# Altium PCB pcb.PcbDoc
Units mil, origin at the board's own origin, x right, y up, seen from the top; angles counter-clockwise.
Board outline 3485 x 1572 mil, 2 copper layers (Top Layer, Bottom Layer); 50 components, 17 nets, 117 pads, 122 vias.
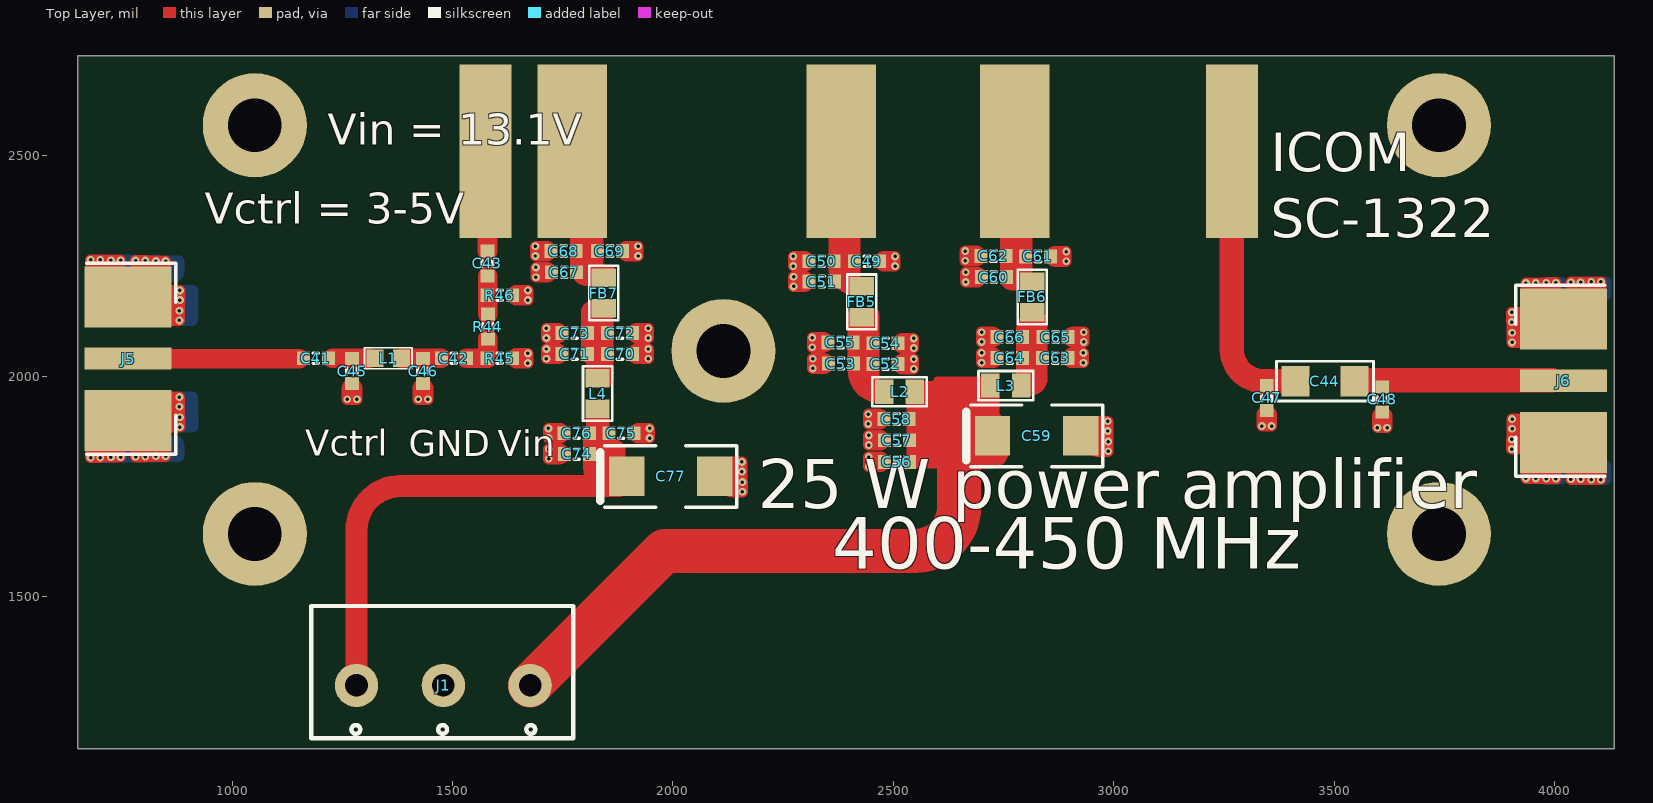
[diagram p0: Top Layer view]
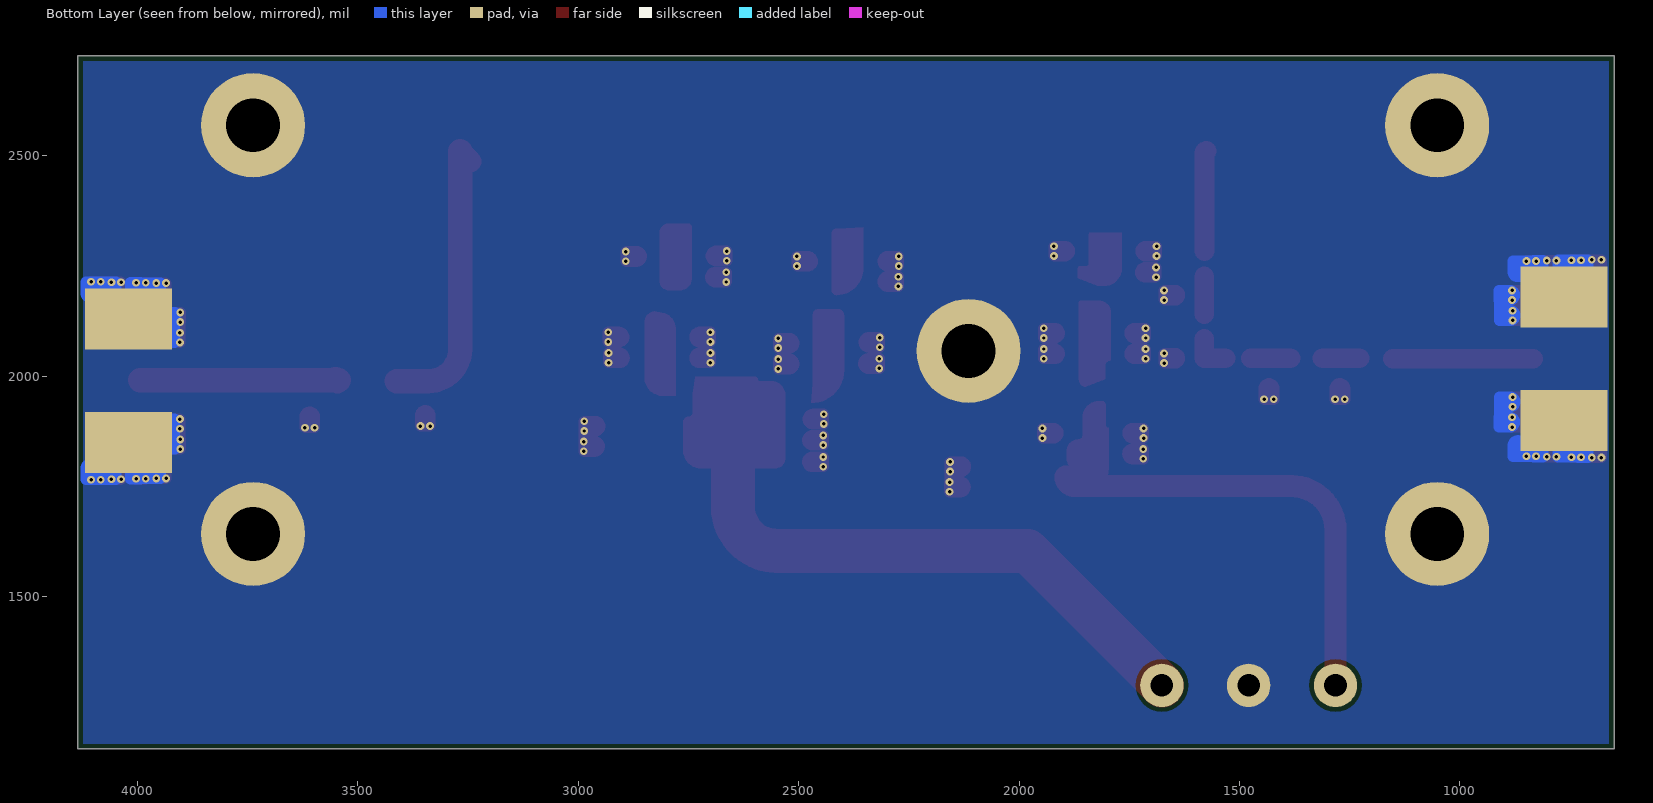
[diagram p1: Bottom Layer view, seen from below]
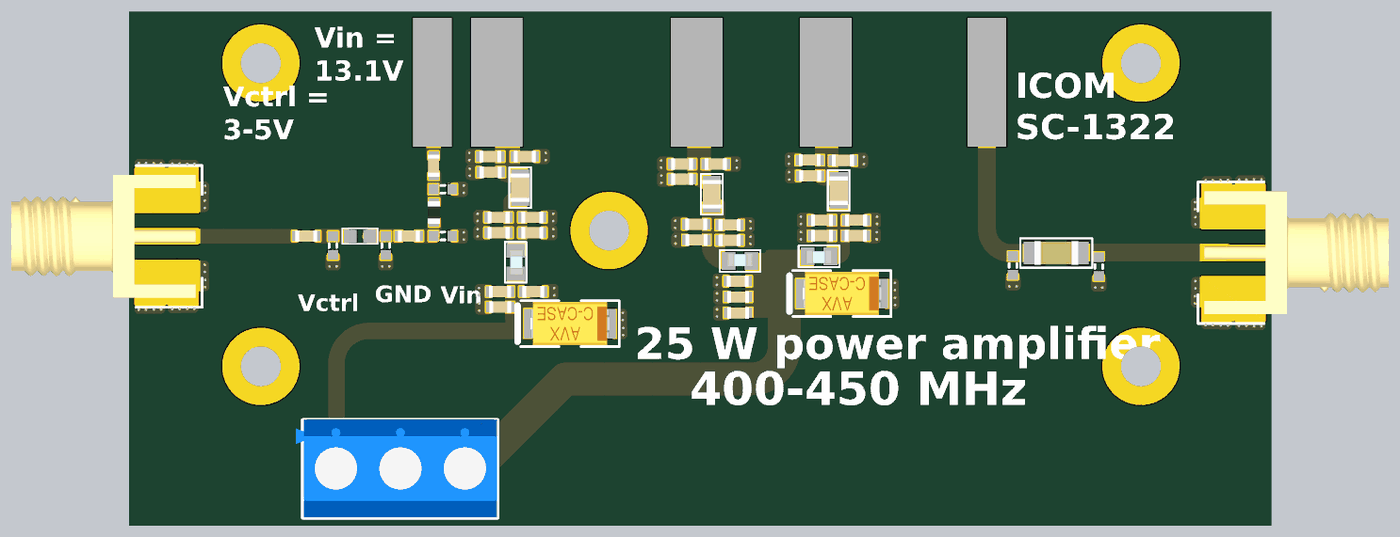
[diagram p2: 3D render of the assembled board from above, using the file's embedded part models]

## Layer stack, top to bottom
Top Solder: solder mask 0.4, Solder Resist, Dk 3.5
Top Layer: signal copper 1.4
Dielectric 1: dielectric 12.6, FR-4, Dk 4.8
Bottom Layer: signal copper 1.4
Bottom Solder: solder mask 0.4, Solder Resist, Dk 3.5

## Board outline
650,1155 4135,1155 4135,2727 650,2727

## Design rules (kind name [scope] priority, off if disabled: settings)
BoardOutlineClearance [OnBottomLayer  Or OnTopLayer] p1: gap=11.81 ignorepadtopadclearanceinfootprint=FALSE
Clearance [All] p1: gap=5 ignorepadtopadclearanceinfootprint=TRUE except(10: Arc-Poly Track-Poly SMDPad-Poly THPad-Poly Via-Poly Fill-Poly Poly-Poly Poly-Region Poly-Text Poly-Hole)
HoleSize [All] p1: absolutevalues=TRUE maxlimit=200 minlimit=7.87 maxpercent=80.000 minpercent=20.000
MinimumSolderMaskSliver [All] p1: minsoldermaskwidth=0
PlaneConnect [All] p1: planeconnectstyle=Direct reliefexpansion=20 reliefentries=4 reliefconductorwidth=10 reliefairgap=10
PolygonConnect [All] p1: connectstyle=Direct reliefconductorwidth=10 reliefentries=4 polygonreliefangle="90 Angle" airgapwidth=10
RoutingVias [All] p1: holewidth=7.87 width=17.72 viastyle="Through Hole" minholewidth=7.87 minwidth=17.72 maxholewidth=7.87 maxwidth=17.72
SilkToSilkClearance [All] p1: silktosilkclearance=0
SilkToSolderMaskClearance [IsPad] p1: minsilkscreentomaskgap=0 clearancetoexposedcopper=TRUE
SolderMaskExpansion [All] p1: expansion=4
Width [All] p1: maxlimit=1000 minlimit=5 preferedwidth=10 minimp=50.000000 maximp=50.000000 favimp=50.000000
25 further rules are at their usual default settings.

## Components (designator, comment, footprint, x,y, rotation, side; value= is the part's Value field where it differs from the comment)
C41 "Ceramic C0G" C_0603_1608 1190,2041 r0 top value=1nF
C42 "Ceramic C0G" C_0603_1608 1503,2041 r0 top value=1nF
C43 "Ceramic C0G" C_0603_1608 1579,2256 r90 top value=1nF
C44 "Ceramic C0G" C_1206_3216 3479,1989 r0 top value=1nF
C45 "-" C_NC_0603_1608 1272,2012 r270 top value=NC
C46 "-" C_NC_0603_1608 1433,2012 r270 top value=NC
C47 "-" C_NC_0603_1608 3347,1951 r270 top value=NC
C48 "-" C_NC_0603_1608 3609,1947.54 r270 top value=NC
C49 "Ceramic C0G" C_0603_1608 2440,2261 r0 top value=2.2pF
C50 "Ceramic C0G" C_0603_1608 2337,2261 r180 top value=330pF
C51 "Ceramic C0G" C_0603_1608 2337.46,2215 r180 top value=1nF
C52 "Ceramic C0G" C_0603_1608 2482,2028 r0 top value=2.2pF
C53 "Ceramic C0G" C_0603_1608 2381,2029 r180 top value=1nF
C54 "Ceramic X7R" C_0603_1608 2482,2075 r0 top value=100nF
C55 "Ceramic X7R" C_0603_1608 2380,2077 r180 top value=1uF
C56 "Ceramic C0G" C_0603_1608 2508,1806 r180 top value=1nF
C57 "Ceramic X7R" C_0603_1608 2508,1855 r180 top value=100nF
C58 "Ceramic X7R" C_0603_1608 2507,1903 r180 top value=1uF
C59 "Tantalum Capacitor" CT_2312_6032 2824.92,1865 r180 top value=22uF
C60 "Ceramic C0G" C_0603_1608 2728,2225 r180 top value=2.2pF
C61 "Ceramic C0G" C_0603_1608 2828,2272 r0 top value=330pF
C62 "Ceramic C0G" C_0603_1608 2727,2273 r180 top value=1nF
C63 "Ceramic C0G" C_0603_1608 2867,2042 r0 top value=2.2pF
C64 "Ceramic C0G" C_0603_1608 2764,2042 r180 top value=1nF
C65 "Ceramic X7R" C_0603_1608 2868,2089 r0 top value=100nF
C66 "Ceramic X7R" C_0603_1608 2764,2089 r180 top value=1uF
C67 "Ceramic C0G" C_0603_1608 1753,2236 r180 top value=2.2pF
C68 "Ceramic C0G" C_0603_1608 1752,2284 r180 top value=330pF
C69 "Ceramic C0G" C_0603_1608 1857,2284 r0 top value=1nF
C70 "Ceramic C0G" C_0603_1608 1880,2051 r0 top value=2.2pF
C71 "Ceramic C0G" C_0603_1608 1777,2051 r180 top value=1nF
C72 "Ceramic X7R" C_0603_1608 1880,2098 r0 top value=100nF
C73 "Ceramic X7R" C_0603_1608 1777,2098 r180 top value=1uF
C74 "Ceramic C0G" C_0603_1608 1782,1824 r180 top value=1nF
C75 "Ceramic X7R" C_0603_1608 1883,1871 r0 top value=100nF
C76 "Ceramic X7R" C_0603_1608 1781.54,1871 r180 top value=1uF
C77 "Tantalum Capacitor" CT_2312_6032 1995,1773 r180 top value=22uF
FB5 "Ferrite bead" FB_0805_2012 2428,2169 r270 top value=BLM21PG300SN1D
FB6 "Ferrite bead" FB_0805_2012 2815,2180 r270 top value=BLM21PG300SN1D
FB7 "Ferrite bead" FB_0805_2012 1843,2189 r270 top value=BLM21PG300SN1D
J1 "ARK3" J_ARK3 1479,1299 r180 top value=DG301-5.0-03P-12-18A(H)
J5 "SMA EDGE" J_SMA_EDGE 665.57,2040 r0 top value="=\"Manufacturer Part Number\""
J6 "SMA EDGE" J_SMA_EDGE 4118.43,1990 r180 top value="=\"Manufacturer Part Number\""
L1 "" L_NC_0603_1608 1354,2041 r0 top value=NC
L2 "Inductor" L_0805_2012 2514,1965 r0 top value=560nH
L3 "Inductor" L_0805_2012 2755,1979 r180 top value=560nH
L4 "Inductor" L_0805_2012 1829,1961 r270 top value=560nH
R44 "Resistor" R_0603_1608 1580,2113 r90 top value=0R
R45 "Resistor" R_NC_0603_1608 1607,2041 r0 top value=NC
R46 "Resistor" R_NC_0603_1608 1607,2184 r0 top value=NC

## Footprints (in the part's own frame and the unit in brackets; to place one, negate y for a bottom-side part, rotate by r counter-clockwise, add the part's x,y. Pads: shape width x height; smd on the part's side, far side on the other; paste and mask are expansions set on the pad)
C_0603_1608 [mm]
  rect 0.75x0.8 smd: 1(-0.725,0) 2(0.725,0)
  silkscreen extent -0.15,-0.3 0.15,0.3, body extent -0.85,-0.45 0.85,0.45, height 0.89
C_1206_3216 [mil]
  rect 64x70 smd: 1(-67,0) 2(67,0)
  silkscreen extent -110,-45 110,45, body extent -67,-35 67,35, height 39
C_NC_0603_1608 [mm]
  rect 0.75x0.8 smd: 1(-0.725,0) 2(0.725,0)
  silkscreen extent -0.15,-0.3 0.15,0.3, body extent -0.85,-0.45 0.85,0.45, height 0.89
CT_2312_6032 [mm]
  rect 2.03x2.28 smd: 1(2.54,0) 2(-2.54,0)
  silkscreen extent -3.81,-1.78 4.06,1.78, body extent -3.05,-1.67 3.05,1.68, height 2.7
FB_0805_2012 [mil]
  rect 42x55 smd: 1(-35,0) 2(35,0)
  silkscreen extent -62,-33 62,33, body extent -43,-29 44,29, height 53
J_ARK3 [mm]
  round 2.5 hole 1.3: 1(-5,0) 2(0,0) 3(5,0)
  silkscreen extent -7.49,-4.57 7.62,3.05, body extent -7.46,-4.6 8.14,3, height 10.05
J_SMA_EDGE [mm]
  rect 5x1.27 smd paste-5: 1(2.5,0)
  rect 5x3.5 smd paste-5: 2(2.5,-3.556) 2(2.5,3.556)
  rect 5x3.5 smd far side paste-5: 2(2.5,-3.556) 2(2.5,3.556)
  silkscreen extent 0.13,-5.5 5.25,5.5, body extent -9.53,-4.77 4.75,4.76, height 4.5
L_0805_2012 [mil]
  rect 42x55 smd: 1(-35,0) 2(35,0)
  silkscreen extent -62,-33 62,33, body extent -39,-18 39,23, height 50
L_NC_0603_1608 [mil]
  rect 39x40 smd: 1(-30,0) 2(30,0)
  silkscreen extent -54,-24 54,24, body extent -31,-20 32,20, height 31
R_0603_1608 [mm]
  rect 0.75x0.8 smd: 1(-0.725,0) 2(0.725,0)
  silkscreen extent -0.15,-0.3 0.15,0.3, body extent -0.87,-0.47 0.88,0.48, height 0.54
R_NC_0603_1608 [mm]
  rect 0.75x0.8 smd: 1(-0.725,0) 2(0.725,0)
  silkscreen extent -0.15,-0.3 0.15,0.3, body extent -0.87,-0.47 0.88,0.48, height 0.54

## Part data
C41 C42 C43 C51 C53 C56 C62 C64 C69 C71 C74: library part C_1nF_50V_C0G_0603_5, "Capacitor", dielectric=C0G, Manufacturer=Samsung, Manufacturer Part Number=CL10C102JB8NNNC, Tolerance (%)=5, voltage=50V, HelpURL=http://www.tme.eu/pl/Document/7da762c1dbaf553c64ad9c40d3603826/mlcc_samsung.pdf, Part Number=C_1nF_50V_C0G_0603_5, SCH_Footprint=0603, Supplier 1=TME, Supplier 2="RS Components", Supplier 3=Farnell, Supplier 4=Mouser, Supplier 5=Digi-Key, Supplier Part Number 1=CL10C102JB8NNNC
C44: library part C_1nF_2kV_C0G_1206_10, "Capacitor", dielectric=C0G, Manufacturer=AVX, Manufacturer Part Number=1206GC102KAT1A, Tolerance (%)=10, voltage=2kV, HelpURL=http://www.tme.eu/pl/Document/667fe6e7748c0ed1675574c6bf64b751/AVX_X7R.pdf, Part Number=C_1nF_2kV_C0G_1206_10, SCH_Footprint=1206, Supplier 1=TME, Supplier 2="RS Components", Supplier 3=Farnell, Supplier 4=Mouser, Supplier 5=Digi-Key, Supplier Part Number 1=1206GC102KAT1A
C45 C46 C47 C48: library part C_GENERIC_0603, "Capacitor", Tolerance (%)=0, voltage=0V, dielectric=-, HelpURL=http://-, Manufacturer=-, Manufacturer Part Number=-, Part Number=C_GENERIC_0603, SCH_Footprint=0603, Supplier 1=TME, Supplier 2="RS Components", Supplier 3=Farnell, Supplier 4=Mouser, Supplier 5=Digi-Key
C49 C52 C60 C63 C67 C70: library part C_2.2pF_100V_C0G_0603_5, "Capacitor", dielectric=C0G, Manufacturer=AVX, Manufacturer Part Number=06031A2R2BAT2A, Tolerance (%)=5, voltage=100V, HelpURL=https://datasheet.octopart.com/06031A2R2BAT2A-AVX-datasheet-167032.pdf, Part Number=C_2.2pF_100V_C0G_0603_5, SCH_Footprint=0603, Supplier 1=TME, Supplier 2="RS Components", Supplier 3=Farnell, Supplier 4=Mouser, Supplier 5=Digi-Key, Supplier Part Number 3=2579012, Supplier Part Number 4=581-06031A2R2BAT2A, Supplier Part Number 5=478-3686-1-ND
C50 C61 C68: library part C_330pF_50V_C0G_0603_5, "Capacitor", dielectric=C0G, Manufacturer=Murata, Manufacturer Part Number=GRM1885C1H331JA01D, Tolerance (%)=5, voltage=50V, HelpURL=http://www.mouser.com/ds/2/281/c02e-2905.pdf, Part Number=C_330pF_50V_C0G_0603_5, SCH_Footprint=0603, Supplier 1=TME, Supplier 2="RS Components", Supplier 3=Farnell, Supplier 4=Mouser, Supplier 5=Digi-Key, Supplier Part Number 1=GRM1885C1H331JA01D
C54 C57 C65 C72 C75: library part C_100nF_50V_X7R_0603_5, "Capacitor", dielectric=X7R, Manufacturer=Samsung, Manufacturer Part Number=CL10B104JB8NNNC, Tolerance (%)=5, voltage=50V, HelpURL=http://www.tme.eu/pl/Document/4a42202b32dab16128fe107dd69598cc/samsung-chip-cap.pdf, Part Number=C_100nF_50V_X7R_0603_5, SCH_Footprint=0603, Supplier 1=TME, Supplier 2="RS Components", Supplier 3=Farnell, Supplier 4=Mouser, Supplier 5=Digi-Key, Supplier Part Number 1=CL10B104JB8NNNC
C55 C58 C66 C73 C76: library part C_1uF_25V_X7R_0603_10, "Capacitor", dielectric=X7R, Manufacturer=Samsung, Manufacturer Part Number=CL10B105KA8NNNC, Tolerance (%)=10, voltage=25V, HelpURL=http://www.tme.eu/pl/Document/4a42202b32dab16128fe107dd69598cc/samsung-chip-cap.pdf, Part Number=C_1uF_25V_X7R_0603_10, SCH_Footprint=0603, Supplier 1=TME, Supplier 2="RS Components", Supplier 3=Farnell, Supplier 4=Mouser, Supplier 5=Digi-Key, Supplier Part Number 1=CL10B105KA8NNNC
C59 C77: library part CT_22uF_16V_TA2O5_2312_10, "Capacitor", dielectric=TA2O5, Manufacturer=Kemet, Manufacturer Part Number=T494C226K016AT, Tolerance (%)=10, voltage=16V, HelpURL=https://content.kemet.com/datasheets/KEM_T2008_T494.pdf, Part Number=CT_22uF_16V_TA2O5_2312_10, SCH_Footprint=2312, Supplier 1=TME, Supplier 2="RS Components", Supplier 3=Farnell, Supplier 4=Mouser, Supplier 5=Digi-Key, Supplier Part Number 1=T494C226K016AT, Supplier Part Number 2=1726639, Supplier Part Number 3=2762195, Supplier Part Number 4=80-T494C226K016, Supplier Part Number 5=399-3845-1-ND
FB5 FB6 FB7: library part FB_BLM21PG300SN1D, "Ferrite Bead", Current=3A, Manufacturer=Murata, Manufacturer Part Number=BLM21PG300SN1D, Resistance=30R, HelpURL=http://www.mouser.com/ds/2/281/c31e-794748.pdf, Part Number=FB_BLM21PG300SN1D, SCH_Footprint=0805, Supplier 1=TME, Supplier 2="RS Components", Supplier 3=Farnell, Supplier 4=Mouser, Supplier 5=Digi-Key, Supplier Part Number 1=BLM21PG300SN1D, Supplier Part Number 2=7241536, Supplier Part Number 3=1515662, Supplier Part Number 4=81-BLM21P300S, Supplier Part Number 5=490-1052-1-ND
J1: library part J_TB-5.0-P-3P, "ARK Screw terminal, 3-Pin", Manufacturer="DEGSON ELECTRONICS", Manufacturer Part Number=DG301-5.0-03P-12-18A(H), Supplier Part Number 1=DG301-5.0-3/6B, Component Type=Standard, HelpURL=https://datasheet.octopart.com/DG301-5.0-03P-12-18A%28H%29-Degson-datasheet-17801202.pdf, Part Number=J_TB-5.0-P-3P, SCH_Footprint=ARK3, Supplier 1=TME, Supplier 2="RS Components", Supplier 3=Farnell, Supplier 4=Mouser, Supplier 5=Digi-Key
J5 J6: library part J_SMA_EDGE_UNIVERSAL, "SMA connector", Component Type=Standard, Part Number=J_SMA_EDGE_UNIVERSAL, SCH_Footprint="SMA EDGE", Supplier 1=TME, Supplier 2="RS Components", Supplier 3=Farnell, Supplier 4=Mouser, Supplier 5=Digi-Key
L1: library part L_0603, "Induction", Part Number=L_0603, SCH_Footprint=0603, Supplier 1=TME, Supplier 2="RS Components", Supplier 3=Farnell, Supplier 4=Mouser, Supplier 5=Digi-Key
L2 L3 L4: library part L_560nH_1.7A_0805, "Induction", Current=1.7A, Manufacturer=Wurth, Manufacturer Part Number=74479974156, Resistance=100mR, HelpURL=https://datasheet.octopart.com/74479974156-W%C3%BCrth-Elektronik-datasheet-62333476.pdf, Part Number=L_560nH_1.7A_0805, SCH_Footprint=0805, Supplier 1=TME, Supplier 2="RS Components", Supplier 3=Farnell, Supplier 4=Mouser, Supplier 5=Digi-Key, Supplier Part Number 2=923-6378, Supplier Part Number 3=2543275, Supplier Part Number 4=710-74479974156, Supplier Part Number 5=732-9693-1-ND
R44: library part R_0R_0603_5, Manufacturer=Samsung, Manufacturer Part Number=RC1608J000CS, Power=100mW, Tolerance=5%, voltage=50V, HelpURL=http://www.samsungsem.com/kr/support/product-search/chip-resistor/RC1608J000CS.jsp, Part Number=R_0R_0603_5, SCH_Footprint=0603, Supplier 1=TME, Supplier 2="RS Components", Supplier 3=Farnell, Supplier 4=Mouser, Supplier 5=Digi-Key, Supplier Part Number 5=1276-3510-1-ND
R45 R46: library part R_GENERIC_0603, Part Number=R_GENERIC_0603, SCH_Footprint=0603, Supplier 1=TME, Supplier 2="RS Components", Supplier 3=Farnell, Supplier 4=Mouser, Supplier 5=Digi-Key

## Free pads (board coordinates)
  round 236.22 hole 122.05: 6(1051.48,1642.48) 6(1051.48,2569.52) 6(2114.47,2057.71) 6(3737.52,1642.48) 6(3737.52,2569.52)
  rect 157.48x393.7 smd: Vcc1(1771.65,2511) Vcc2(2381.89,2511) Vcc3(2775.59,2511)
  rect 118.11x393.7 smd: Vin(1574.8,2511) Vout(3267.72,2511)

## Via types
v1: diameter 17.72, hole 7.87, Top Layer to Bottom Layer, tented both sides, 122 vias

## Nets (pads, with @x,y where several pads share a name; then routed paths per layer and width w, separated by ;. In a path a pad name is that pad's centre, name@x,y a point inside that pad or via, vN(x,y) a via of type N, cw(c..) or ccw(c..) an arc to the next point about the centre after c; other vN are vias at no path point)
GND: C45.2 C46.2 C47.2 C48.2 C49.2 C50.2 C51.2 C52.2 C53.2 C54.2 C55.2 C56.2 C57.2 C58.2 C59.2 C60.2 C61.2 C62.2 C63.2 C64.2 C65.2 C66.2 C67.2 C68.2 C69.2 C70.2 C71.2 C72.2 C73.2 C74.2 C75.2 C76.2 C77.2 J1.2 J5.2 J6.2 pad.6 R45.2 R46.2 | length 9603.9
  Top Layer w25: v1(701,1815.54) cw(c702,1815.54) 702,1816.54 v1(725,1816.54) ; v1(701,1815.54) 701,1840 ccw(c690,1840) 690,1851 ccw(c690,1840) 679,1840 v1(679,1815.54) v1(701,1815.54) ; v1(701,2264.46) ccw(c702,2264.46) 702,2263.46 v1(725,2263.46) ; v1(701,2264.46) 701,2240 cw(c690,2240) 690,2229 cw(c690,2240) 679,2240 v1(679,2264.46) v1(701,2264.46) ; v1(725,1816.54) 725,1841 cw(c736,1841) 736,1852 cw(c736,1841) 747,1841 v1(747,1816.54) v1(725,1816.54) ; v1(725,2263.46) 725,2239 ccw(c736,2239) 736,2228 ccw(c736,2239) 747,2239 v1(747,2263.46) v1(725,2263.46) ; v1(803,1817.54) cw(c804,1817.54) 804,1818.54 v1(827,1818.54) ; v1(803,1817.54) 803,1842 ccw(c792,1842) 792,1853 ccw(c792,1842) 781,1842 v1(781,1817.54) v1(803,1817.54) ; v1(803,2262.46) ccw(c804,2262.46) 804,2261.46 v1(827,2261.46) ; v1(803,2262.46) 803,2238 cw(c792,2238) 792,2227 cw(c792,2238) 781,2238 v1(781,2262.46) v1(803,2262.46) ; v1(827,1818.54) 827,1843 cw(c838,1843) 838,1854 cw(c838,1843) 849,1843 v1(849,1818.54) v1(827,1818.54) ; v1(827,2261.46) 827,2237 ccw(c838,2237) 838,2226 ccw(c838,2237) 849,2237 v1(849,2261.46) v1(827,2261.46) ; v1(880.46,1931) 856,1931 cw(c856,1942) 845,1942 cw(c856,1942) 856,1953 v1(880.46,1953) v1(880.46,1931) ; v1(880.46,1931) 880.46,1908 ccw(c881.46,1908) v1(881.46,1907) ; v1(880.46,2149) 856,2149 ccw(c856,2138) 845,2138 ccw(c856,2138) 856,2127 v1(880.46,2127) v1(880.46,2149) ; v1(880.46,2149) 880.46,2172 cw(c881.46,2172) v1(881.46,2173) ; v1(881.46,1907) 857,1907 ccw(c857,1896) 846,1896 ccw(c857,1896) 857,1885 v1(881.46,1885) v1(881.46,1907) ; v1(881.46,2173) 857,2173 cw(c857,2184) 846,2184 cw(c857,2184) 857,2195 v1(881.46,2195) v1(881.46,2173) ; v1(2156.46,1784) v1(2156.46,1806) 2132,1806 ccw(c2132,1795) 2121,1795 ccw(c2132,1795) 2132,1784 v1(2156.46,1784) ; v1(2156.46,1784) 2156.46,1761 ccw(c2157.46,1761) v1(2157.46,1760) ; v1(2157.46,1760) v1(2157.46,1738) 2133,1738 cw(c2133,1749) 2122,1749 cw(c2133,1749) 2133,1760 v1(2157.46,1760) ; v1(2986.38,1876) 2961.92,1876 cw(c2961.92,1887) 2950.92,1887 cw(c2961.92,1887) 2961.92,1898 v1(2986.38,1898) v1(2986.38,1876) ; v1(2986.38,1876) 2986.38,1853 ccw(c2987.38,1853) v1(2987.38,1852) ; v1(2987.38,1852) 2962.92,1852 ccw(c2962.92,1841) 2951.92,1841 ccw(c2962.92,1841) 2962.92,1830 v1(2987.38,1830) v1(2987.38,1852) ; v1(3902.54,1857) ccw(c3902.54,1858) 3903.54,1858 v1(3903.54,1881) ; v1(3902.54,1857) 3927,1857 cw(c3927,1846) 3938,1846 cw(c3927,1846) 3927,1835 v1(3902.54,1835) v1(3902.54,1857) ; v1(3902.54,2123) cw(c3902.54,2122) 3903.54,2122 v1(3903.54,2099) ; v1(3902.54,2123) v1(3902.54,2145) 3927,2145 cw(c3927,2134) 3938,2134 cw(c3927,2134) 3927,2123 v1(3902.54,2123) ; v1(3903.54,1881) v1(3903.54,1903) 3928,1903 cw(c3928,1892) 3939,1892 cw(c3928,1892) 3928,1881 v1(3903.54,1881) ; v1(3903.54,2099) 3928,2099 cw(c3928,2088) 3939,2088 cw(c3928,2088) 3928,2077 v1(3903.54,2077) v1(3903.54,2099) ; v1(3957,1768.54) 3957,1793 ccw(c3946,1793) 3946,1804 ccw(c3946,1793) 3935,1793 v1(3935,1768.54) v1(3957,1768.54) ; v1(3957,1768.54) 3980,1768.54 cw(c3980,1767.54) v1(3981,1767.54) ; v1(3957,2211.46) v1(3935,2211.46) 3935,2187 ccw(c3946,2187) 3946,2176 ccw(c3946,2187) 3957,2187 v1(3957,2211.46) ; v1(3957,2211.46) 3980,2211.46 ccw(c3980,2212.46) v1(3981,2212.46) ; v1(3981,1767.54) 3981,1792 cw(c3992,1792) 3992,1803 cw(c3992,1792) 4003,1792 v1(4003,1767.54) v1(3981,1767.54) ; v1(3981,2212.46) v1(4003,2212.46) 4003,2188 cw(c3992,2188) 3992,2177 cw(c3992,2188) 3981,2188 v1(3981,2212.46) ; v1(4059,1766.54) 4059,1791 ccw(c4048,1791) 4048,1802 ccw(c4048,1791) 4037,1791 v1(4037,1766.54) v1(4059,1766.54) ; v1(4059,1766.54) 4082,1766.54 cw(c4082,1765.54) v1(4083,1765.54) ; v1(4059,2213.46) v1(4037,2213.46) 4037,2189 ccw(c4048,2189) 4048,2178 ccw(c4048,2189) 4059,2189 v1(4059,2213.46) ; v1(4059,2213.46) 4082,2213.46 ccw(c4082,2214.46) v1(4083,2214.46) ; v1(4083,1765.54) v1(4105,1765.54) 4105,1790 ccw(c4094,1790) 4094,1801 ccw(c4094,1790) 4083,1790 v1(4083,1765.54) ; v1(4083,2214.46) v1(4105,2214.46) 4105,2190 cw(c4094,2190) 4094,2179 cw(c4094,2190) 4083,2190 v1(4083,2214.46) ; v1(1261,1948) 1261,1972.46 cw(c1272,1972.46) C45.2 cw(c1272,1972.46) 1283,1972.46 v1(1283,1948) v1(1261,1948) ; v1(1422,1948) v1(1444,1948) 1444,1972.46 ccw(c1433,1972.46) C46.2 ccw(c1433,1972.46) 1422,1972.46 v1(1422,1948) ; R45.2 cw(c1646.54,2041) 1646.54,2052 v1(1671,2052) v1(1671,2030) 1646.54,2030 cw(c1646.54,2041) R45.2 ; R46.2 cw(c1646.54,2184) 1646.54,2195 v1(1671,2195) v1(1671,2173) 1646.54,2173 cw(c1646.54,2184) R46.2 ; v1(1688,2273) v1(1688,2295) 1712.46,2295 cw(c1712.46,2284) C68.2 cw(c1712.46,2284) 1712.46,2273 v1(1688,2273) ; v1(1689,2225) v1(1689,2247) 1713.46,2247 cw(c1713.46,2236) C67.2 cw(c1713.46,2236) 1713.46,2225 v1(1689,2225) ; v1(1713,2040) v1(1713,2062) 1737.46,2062 cw(c1737.46,2051) C71.2 cw(c1737.46,2051) 1737.46,2040 v1(1713,2040) ; v1(1713,2087) v1(1713,2109) 1737.46,2109 cw(c1737.46,2098) C73.2 cw(c1737.46,2098) 1737.46,2087 v1(1713,2087) ; v1(1717.54,1860) v1(1717.54,1882) 1742,1882 cw(c1742,1871) C76.2 cw(c1742,1871) 1742,1860 v1(1717.54,1860) ; v1(1718,1813) v1(1718,1835) 1742.46,1835 cw(c1742.46,1824) C74.2 cw(c1742.46,1824) 1742.46,1813 v1(1718,1813) ; C69.2 cw(c1896.54,2284) 1896.54,2295 v1(1921,2295) v1(1921,2273) 1896.54,2273 cw(c1896.54,2284) C69.2 ; C70.2 cw(c1919.54,2051) 1919.54,2062 v1(1944,2062) v1(1944,2040) 1919.54,2040 cw(c1919.54,2051) C70.2 ; C72.2 cw(c1919.54,2098) 1919.54,2109 v1(1944,2109) v1(1944,2087) 1919.54,2087 cw(c1919.54,2098) C72.2 ; C75.2 cw(c1922.54,1871) 1922.54,1882 v1(1947,1882) v1(1947,1860) 1922.54,1860 cw(c1922.54,1871) C75.2 ; v1(2273,2250) v1(2273,2272) 2297.46,2272 cw(c2297.46,2261) C50.2 cw(c2297.46,2261) 2297.46,2250 v1(2273,2250) ; v1(2273.46,2204) v1(2273.46,2226) 2297.91,2226 cw(c2297.91,2215) C51.2 cw(c2297.91,2215) 2297.91,2204 v1(2273.46,2204) ; v1(2316,2066) v1(2316,2088) 2340.46,2088 cw(c2340.46,2077) C55.2 cw(c2340.46,2077) 2340.46,2066 v1(2316,2066) ; v1(2317,2018) v1(2317,2040) 2341.46,2040 cw(c2341.46,2029) C53.2 cw(c2341.46,2029) 2341.46,2018 v1(2317,2018) ; v1(2443,1892) v1(2443,1914) 2467.46,1914 cw(c2467.46,1903) C58.2 cw(c2467.46,1903) 2467.46,1892 v1(2443,1892) ; v1(2444,1795) v1(2444,1817) 2468.46,1817 cw(c2468.46,1806) C56.2 cw(c2468.46,1806) 2468.46,1795 v1(2444,1795) ; v1(2444,1844) v1(2444,1866) 2468.46,1866 cw(c2468.46,1855) C57.2 cw(c2468.46,1855) 2468.46,1844 v1(2444,1844) ; C49.2 cw(c2479.54,2261) 2479.54,2272 v1(2504,2272) v1(2504,2250) 2479.54,2250 cw(c2479.54,2261) C49.2 ; C52.2 cw(c2521.54,2028) 2521.54,2039 v1(2546,2039) v1(2546,2017) 2521.54,2017 cw(c2521.54,2028) C52.2 ; C54.2 cw(c2521.54,2075) 2521.54,2086 v1(2546,2086) v1(2546,2064) 2521.54,2064 cw(c2521.54,2075) C54.2 ; v1(2663,2262) v1(2663,2284) 2687.46,2284 cw(c2687.46,2273) C62.2 cw(c2687.46,2273) 2687.46,2262 v1(2663,2262) ; v1(2664,2214) v1(2664,2236) 2688.46,2236 cw(c2688.46,2225) C60.2 cw(c2688.46,2225) 2688.46,2214 v1(2664,2214) ; v1(2700,2031) v1(2700,2053) 2724.46,2053 cw(c2724.46,2042) C64.2 cw(c2724.46,2042) 2724.46,2031 v1(2700,2031) ; v1(2700,2078) v1(2700,2100) 2724.46,2100 cw(c2724.46,2089) C66.2 cw(c2724.46,2089) 2724.46,2078 v1(2700,2078) ; C61.2 cw(c2867.54,2272) 2867.54,2283 v1(2892,2283) v1(2892,2261) 2867.54,2261 cw(c2867.54,2272) C61.2 ; C63.2 cw(c2906.54,2042) 2906.54,2053 v1(2931,2053) v1(2931,2031) 2906.54,2031 cw(c2906.54,2042) C63.2 ; C65.2 cw(c2907.54,2089) 2907.54,2100 v1(2932,2100) v1(2932,2078) 2907.54,2078 cw(c2907.54,2089) C65.2 ; v1(3336,1887) 3336,1911.46 cw(c3347,1911.46) C47.2 cw(c3347,1911.46) 3358,1911.46 v1(3358,1887) v1(3336,1887) ; v1(3598,1883.54) 3598,1908 cw(c3609,1908) C48.2 cw(c3609,1908) 3620,1908 v1(3620,1883.54) v1(3598,1883.54)
  Bottom Layer w25: v1@731,1815.54 cw(c732,1815.54) 732,1816.54 v1@755,1816.54 ; v1@731,1815.54 731,1840 ccw(c720,1840) 720,1851 ccw(c720,1840) 709,1840 709,1815.54 v1@731,1815.54 ; v1@731,2264.46 ccw(c732,2264.46) 732,2263.46 v1@755,2263.46 ; v1@731,2264.46 709,2264.46 709,2240 ccw(c720,2240) 720,2229 ccw(c720,2240) 731,2240 v1@731,2264.46 ; v1@755,1816.54 755,1841 cw(c766,1841) 766,1852 cw(c766,1841) 777,1841 777,1816.54 v1@755,1816.54 ; v1@755,2263.46 755,2239 ccw(c766,2239) 766,2228 ccw(c766,2239) 777,2239 777,2263.46 v1@755,2263.46 ; v1@833,1817.54 cw(c834,1817.54) 834,1818.54 v1@857,1818.54 ; v1@833,1817.54 811,1817.54 811,1842 cw(c822,1842) 822,1853 cw(c822,1842) 833,1842 v1@833,1817.54 ; v1@833,2262.46 ccw(c834,2262.46) 834,2261.46 v1@857,2261.46 ; v1@833,2262.46 811,2262.46 811,2238 ccw(c822,2238) 822,2227 ccw(c822,2238) 833,2238 v1@833,2262.46 ; v1@857,1818.54 857,1843 cw(c868,1843) 868,1854 cw(c868,1843) 879,1843 879,1818.54 v1@857,1818.54 ; v1@857,2261.46 857,2237 ccw(c868,2237) 868,2226 ccw(c868,2237) 879,2237 879,2261.46 v1@857,2261.46 ; 910.46,1931 910.46,1953 886,1953 ccw(c886,1942) 875,1942 ccw(c886,1942) 886,1931 910.46,1931 ; 910.46,1931 910.46,1908 ccw(c911.46,1908) 911.46,1907 ; 910.46,2149 886,2149 ccw(c886,2138) 875,2138 ccw(c886,2138) 886,2127 910.46,2127 910.46,2149 ; 910.46,2149 910.46,2172 cw(c911.46,2172) 911.46,2173 ; 911.46,1907 911.46,1885 887,1885 cw(c887,1896) 876,1896 cw(c887,1896) 887,1907 911.46,1907 ; 911.46,2173 887,2173 cw(c887,2184) 876,2184 cw(c887,2184) 887,2195 911.46,2195 911.46,2173 ; 3914.54,1857 ccw(c3914.54,1858) 3915.54,1858 3915.54,1881 ; 3914.54,1857 3939,1857 cw(c3939,1846) 3950,1846 cw(c3939,1846) 3939,1835 3914.54,1835 3914.54,1857 ; 3914.54,2123 cw(c3914.54,2122) 3915.54,2122 3915.54,2099 ; 3914.54,2123 3939,2123 ccw(c3939,2134) 3950,2134 ccw(c3939,2134) 3939,2145 3914.54,2145 3914.54,2123 ; 3915.54,1881 3940,1881 ccw(c3940,1892) 3951,1892 ccw(c3940,1892) 3940,1903 3915.54,1903 3915.54,1881 ; 3915.54,2099 3940,2099 cw(c3940,2088) 3951,2088 cw(c3940,2088) 3940,2077 3915.54,2077 3915.54,2099 ; 3969,1768.54 3947,1768.54 3947,1793 cw(c3958,1793) 3958,1804 cw(c3958,1793) 3969,1793 3969,1768.54 ; 3969,1768.54 3992,1768.54 cw(c3992,1767.54) 3993,1767.54 ; 3969,2211.46 3947,2211.46 3947,2187 ccw(c3958,2187) 3958,2176 ccw(c3958,2187) 3969,2187 3969,2211.46 ; 3969,2211.46 3992,2211.46 ccw(c3992,2212.46) 3993,2212.46 ; 3993,1767.54 4015,1767.54 4015,1792 ccw(c4004,1792) 4004,1803 ccw(c4004,1792) 3993,1792 3993,1767.54 ; 3993,2212.46 4015,2212.46 4015,2188 cw(c4004,2188) 4004,2177 cw(c4004,2188) 3993,2188 3993,2212.46 ; 4071,1766.54 4049,1766.54 4049,1791 cw(c4060,1791) 4060,1802 cw(c4060,1791) 4071,1791 4071,1766.54 ; 4071,1766.54 4094,1766.54 cw(c4094,1765.54) 4095,1765.54 ; 4071,2213.46 4071,2189 cw(c4060,2189) 4060,2178 cw(c4060,2189) 4049,2189 4049,2213.46 4071,2213.46 ; 4071,2213.46 4094,2213.46 ccw(c4094,2214.46) 4095,2214.46 ; 4095,1765.54 4117,1765.54 4117,1790 ccw(c4106,1790) 4106,1801 ccw(c4106,1790) 4095,1790 4095,1765.54 ; 4095,2214.46 4095,2190 ccw(c4106,2190) 4106,2179 ccw(c4106,2190) 4117,2190 4117,2214.46 4095,2214.46
NetC41_1: C41.1 J5.1 | length 318
  Top Layer w45: J5.1@834,2040 C41.1@1152,2040
NetC41_2: C41.2 C45.1 L1.1 | length 83.5
  Top Layer w45: C41.2@1228,2041 L1.1@1311.54,2041
NetC42_1: C42.1 C46.1 L1.2 | length 90.5
  Top Layer w45: L1.2 1457.46,2041 C42.1
NetC42_2: C42.2 R44.1 R45.1 | length 91.3
  Top Layer w45: C42.2 R45.1 ccw(c1578.46,2042.54) 1580,2042.54 R44.1
NetC43_1: C43.1 R44.2 R46.1 | length 84.9
  Top Layer w45: R44.2 C43.1@1580,2226.46
NetC44_2: C44.2 C48.1 J6.1 | length 458.9
  Top Layer w55: C44.2@3543,1991 J6.1@3994,1991 ; C44.2 cw(c3551,1989) C44.2@3551,1994
NetC52_1: C52.1 C53.1 C54.1 C55.1 FB5.2 L2.1
NetC63_1: C63.1 C64.1 C65.1 C66.1 FB6.2 L3.1
NetC70_1: C70.1 C71.1 C72.1 C73.1 FB7.2 L4.1
Vcc1: C67.1 C68.1 C69.1 FB7.1 pad.Vcc1
Vcc2: C49.1 C50.1 C51.1 FB5.1 pad.Vcc2
Vcc3: C60.1 C61.1 C62.1 FB6.1 pad.Vcc3
Vctrl: C74.1 C75.1 C76.1 C77.1 J1.3 L4.2 | length 1034.5
  Top Layer w50: J1.3 1282.15,1651 cw(c1382.15,1651) 1382.15,1751 1873,1751 ccw(c1873,1773) C77.1
Vin: C56.1 C57.1 C58.1 C59.1 J1.1 L2.2 L3.2 | length 1302.6
  Top Layer w100: J1.1 1980.85,1604 2549,1604 ccw(c2549,1704) 2649,1704 2649,1850
Vin_: C43.2 pad.Vin | length 228.9
  Top Layer w45: pad.Vin cw(c1574.8,2506.8) 1579,2506.8 C43.2
Vout: C44.1 C47.1 pad.Vout | length 657.8
  Top Layer w50: pad.Vout@3244,2487.28 pad.Vout
  Top Layer w55: pad.Vout 3267.72,2061.28 ccw(c3340,2061.28) C47.1@3340,1989 ; C47.1@3351,1989 C44.1

## Polygon pours and split planes (outlines as drawn)
GND on Bottom Layer "Bottom Layer-GND" (solid, remove dead copper, pour order 4): 636.31,1135 4128.19,1135 4126.93,2818 624.19,2818

## Other copper
Top Layer:
  region net Vin: 2734,1998.56 2597.56,1998.56 ccw(c2597.56,1994) 2593,1994 cw(c2588,1994) 2588,1989 2561,1989 ccw(c2561,1958) 2530,1958 2530,1814 ccw(c2553,1814) 2553,1791 2720.83,1791 ccw(c2720.83,1832) 2761.83,1832 2761.83,1897.17 ccw(c2751.01,1897.17) 2751.01,1908 cw(c2751.01,1919.01) 2740,1919.01 2740,1961
  region net NetC63_1: 2815,2145 ccw(c2815,2109) 2779,2109 2779,1956 2810,1956 ccw(c2810,1995) 2849,1995 2849,2124 ccw(c2825,2124) 2825,2148
  region net Vcc3: 2752,2347 ccw(c2752,2337) 2742,2337 2742,2223 ccw(c2770,2223) 2770,2195 2795,2195 ccw(c2795,2215) 2815,2215 2815,2328 ccw(c2797,2328) 2797,2346
  region net NetC52_1: 2471,1939 cw(c2471,2013) 2397,2013 2397,2140 cw(c2409,2140) 2409,2152 2457,2152 cw(c2457,2141.54) 2467.46,2141.54 2467.46,1984.5
  region net Vcc2: 2351,2338 cw(c2351,2336) 2353,2336 2353,2245 ccw(c2414,2245) 2414,2184 ccw(c2414,2195) 2425,2195 2425,2325 ccw(c2415,2325) 2415,2335
  region net Vcc1: 1867,2223 1867,2244 ccw(c1861,2244) 1861,2250 1846.9,2250 cw(c1846.9,2254.9) 1842,2254.9 1842,2322 ccw(c1838,2322) 1838,2326 1767,2326 1767,2244 ccw(c1806,2244) 1806,2205 1822.64,2205
  region net NetC70_1: 1804.37,1993 1804.37,2023.63 ccw(c1792,2023.63) 1792,2036 1792,2146 cw(c1818,2146) 1818,2172 1858.06,2172 cw(c1858.06,2171) 1859.06,2171 1861,2171 cw(c1861,2168) 1864,2168 1864,1991 cw(c1849,1991) 1849,1976
  region net Vctrl: 1892,1809 1892,1831 ccw(c1866,1831) 1866,1857 cw(c1866,1867) 1856,1867 1856,1907 ccw(c1819,1907) 1819,1944 1812,1944 ccw(c1812,1935) 1803,1935 1803,1889 cw(c1797,1889) 1797,1883 1797,1791 ccw(c1859,1791) 1859,1729

## Silkscreen, mask and mechanical layers (free items; w line width, h text height)
Top Overlay:
  text "Vin = 13.1V" at 1217,2502 h120
  text "Vctrl = 3-5V" at 938,2322 h120
  text "ICOM / SC-1322" at 3356,2286 h150
  text "Vctrl" at 1166,1801 h100
  text "GND" at 1401,1799 h100
  text "Vin" at 1602,1799 h100
  text "25 W power amplifier" at 2192,1665 h190
  text "400-450 MHz" at 2361,1525 h200
Bottom Solder:
  region: 896.5,2728 896.5,1486 3897.5,1486 3897.5,2728
Mechanical 1:
  the board outline again, w10

## Text inside footprints (layer, text, board x,y; h text height)
C41: Mechanical 17 "d" at 1155,2036 h10; Mechanical 19 "-" at 1155,2036 h10
C42: Mechanical 17 "d" at 1468,2036 h10; Mechanical 19 "-" at 1468,2036 h10
C43: Mechanical 17 "d" at 1584,2221 h10 r90; Mechanical 19 "-" at 1584,2221 h10 r90
C44: Mechanical 17 "d" at 3414,1984 h15; Mechanical 19 "-" at 3414,1984 h15
C45: Mechanical 17 "d" at 1267,2047 h10 r270
C46: Mechanical 17 "d" at 1428,2047 h10 r270
C47: Mechanical 17 "d" at 3342,1986 h10 r270
C48: Mechanical 17 "d" at 3604,1982.54 h10 r270
C49: Mechanical 17 "d" at 2405,2256 h10; Mechanical 19 "-" at 2405,2256 h10
C50: Mechanical 17 "d" at 2372,2266 h10 r180; Mechanical 19 "-" at 2372,2266 h10 r180
C51: Mechanical 17 "d" at 2372.46,2220 h10 r180; Mechanical 19 "-" at 2372.46,2220 h10 r180
C52: Mechanical 17 "d" at 2447,2023 h10; Mechanical 19 "-" at 2447,2023 h10
C53: Mechanical 17 "d" at 2416,2034 h10 r180; Mechanical 19 "-" at 2416,2034 h10 r180
C54: Mechanical 17 "d" at 2447,2070 h10; Mechanical 19 "-" at 2447,2070 h10
C55: Mechanical 17 "d" at 2415,2082 h10 r180; Mechanical 19 "-" at 2415,2082 h10 r180
C56: Mechanical 17 "d" at 2543,1811 h10 r180; Mechanical 19 "-" at 2543,1811 h10 r180
C57: Mechanical 17 "d" at 2543,1860 h10 r180; Mechanical 19 "-" at 2543,1860 h10 r180
C58: Mechanical 17 "d" at 2542,1908 h10 r180; Mechanical 19 "-" at 2542,1908 h10 r180
C59: Mechanical 17 "d" at 2884.92,1855 h20 r180; Mechanical 19 "-" at 2884.92,1895 h20 r180
C60: Mechanical 17 "d" at 2763,2230 h10 r180; Mechanical 19 "-" at 2763,2230 h10 r180
C61: Mechanical 17 "d" at 2793,2267 h10; Mechanical 19 "-" at 2793,2267 h10
C62: Mechanical 17 "d" at 2762,2278 h10 r180; Mechanical 19 "-" at 2762,2278 h10 r180
C63: Mechanical 17 "d" at 2832,2037 h10; Mechanical 19 "-" at 2832,2037 h10
C64: Mechanical 17 "d" at 2799,2047 h10 r180; Mechanical 19 "-" at 2799,2047 h10 r180
C65: Mechanical 17 "d" at 2833,2084 h10; Mechanical 19 "-" at 2833,2084 h10
C66: Mechanical 17 "d" at 2799,2094 h10 r180; Mechanical 19 "-" at 2799,2094 h10 r180
C67: Mechanical 17 "d" at 1788,2241 h10 r180; Mechanical 19 "-" at 1788,2241 h10 r180
C68: Mechanical 17 "d" at 1787,2289 h10 r180; Mechanical 19 "-" at 1787,2289 h10 r180
C69: Mechanical 17 "d" at 1822,2279 h10; Mechanical 19 "-" at 1822,2279 h10
C70: Mechanical 17 "d" at 1845,2046 h10; Mechanical 19 "-" at 1845,2046 h10
C71: Mechanical 17 "d" at 1812,2056 h10 r180; Mechanical 19 "-" at 1812,2056 h10 r180
C72: Mechanical 17 "d" at 1845,2093 h10; Mechanical 19 "-" at 1845,2093 h10
C73: Mechanical 17 "d" at 1812,2103 h10 r180; Mechanical 19 "-" at 1812,2103 h10 r180
C74: Mechanical 17 "d" at 1817,1829 h10 r180; Mechanical 19 "-" at 1817,1829 h10 r180
C75: Mechanical 17 "d" at 1848,1866 h10; Mechanical 19 "-" at 1848,1866 h10
C76: Mechanical 17 "d" at 1816.54,1876 h10 r180; Mechanical 19 "-" at 1816.54,1876 h10 r180
C77: Mechanical 17 "d" at 2055,1763 h20 r180; Mechanical 19 "-" at 2055,1803 h20 r180
FB5: Mechanical 17 "d" at 2408,2214 h10 r270; Mechanical 19 "-" at 2408,2214 h10 r270
FB6: Mechanical 17 "d" at 2795,2225 h10 r270; Mechanical 19 "-" at 2795,2225 h10 r270
FB7: Mechanical 17 "d" at 1823,2234 h10 r270; Mechanical 19 "-" at 1823,2234 h10 r270
J1: Mechanical 17 "d" at 1747.43,1309 h40 r180; Mechanical 19 "-" at 1747.43,1309 h40 r180
J5: Mechanical 17 "d" at 510.06,2033.11 h15; Mechanical 19 "-" at 510.06,2033.11 h15
J6: Mechanical 17 "d" at 4273.94,1996.89 h15 r180; Mechanical 19 "-" at 4273.94,1996.89 h15 r180
L1: Mechanical 17 "d" at 1314,2026 h10; Mechanical 19 "-" at 1314,2026 h10
L2: Mechanical 17 "d" at 2471,1954 h10; Mechanical 19 "-" at 2471,1954 h10
L3: Mechanical 17 "d" at 2798,1990 h10 r180; Mechanical 19 "-" at 2798,1990 h10 r180
L4: Mechanical 17 "d" at 1818,2004 h10 r270; Mechanical 19 "-" at 1818,2004 h10 r270
R44: Mechanical 17 "d" at 1575,2083 h10 r90; Mechanical 19 "-" at 1595,2083 h10 r90
R45: Mechanical 17 "d" at 1577,2046 h10; Mechanical 19 "-" at 1577,2026 h10
R46: Mechanical 17 "d" at 1577,2189 h10; Mechanical 19 "-" at 1577,2169 h10